# Allegro board ESP8266_PL2303_RELAY.brd
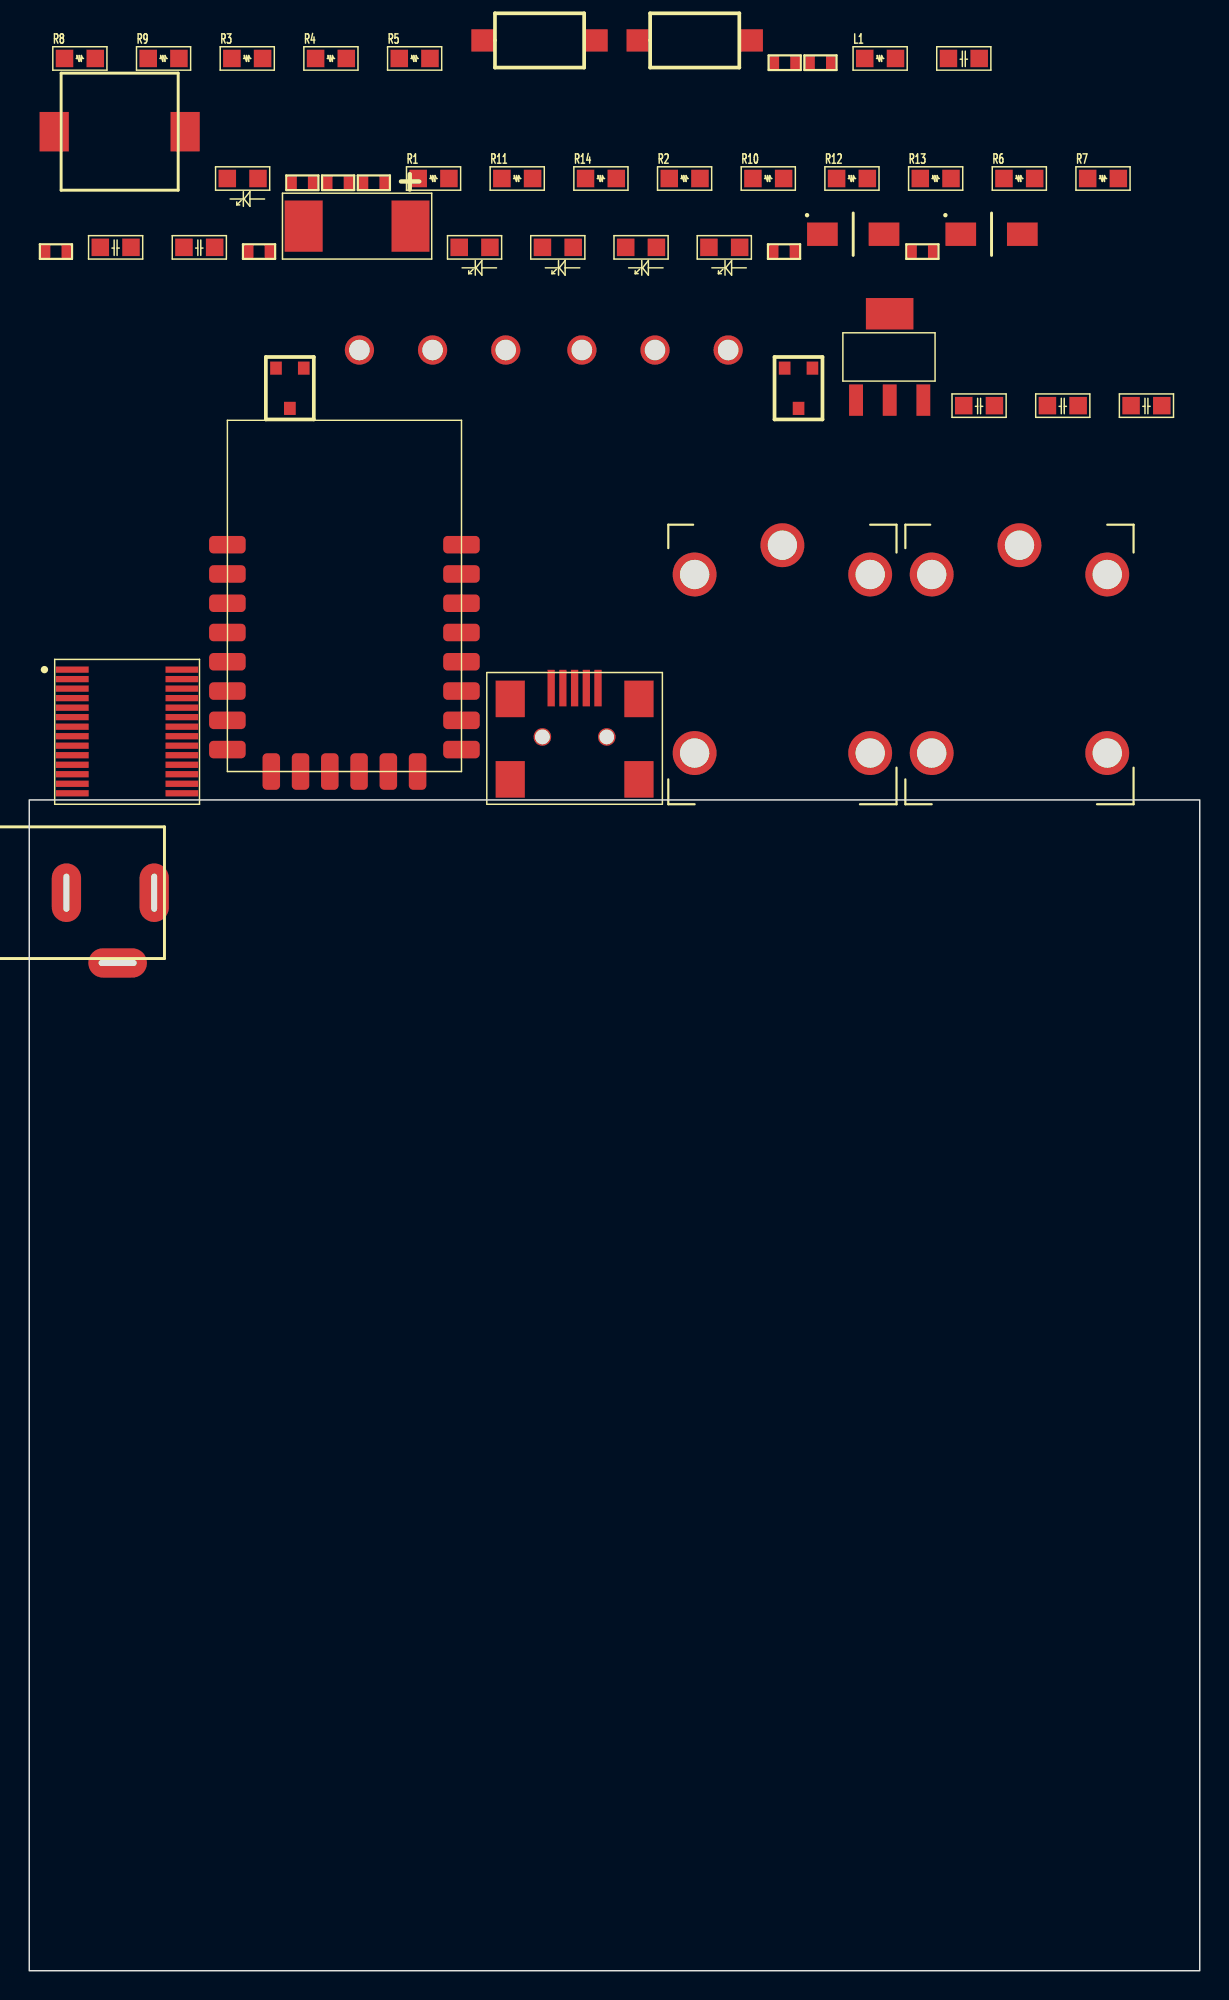
[diagram p0: board, top side]
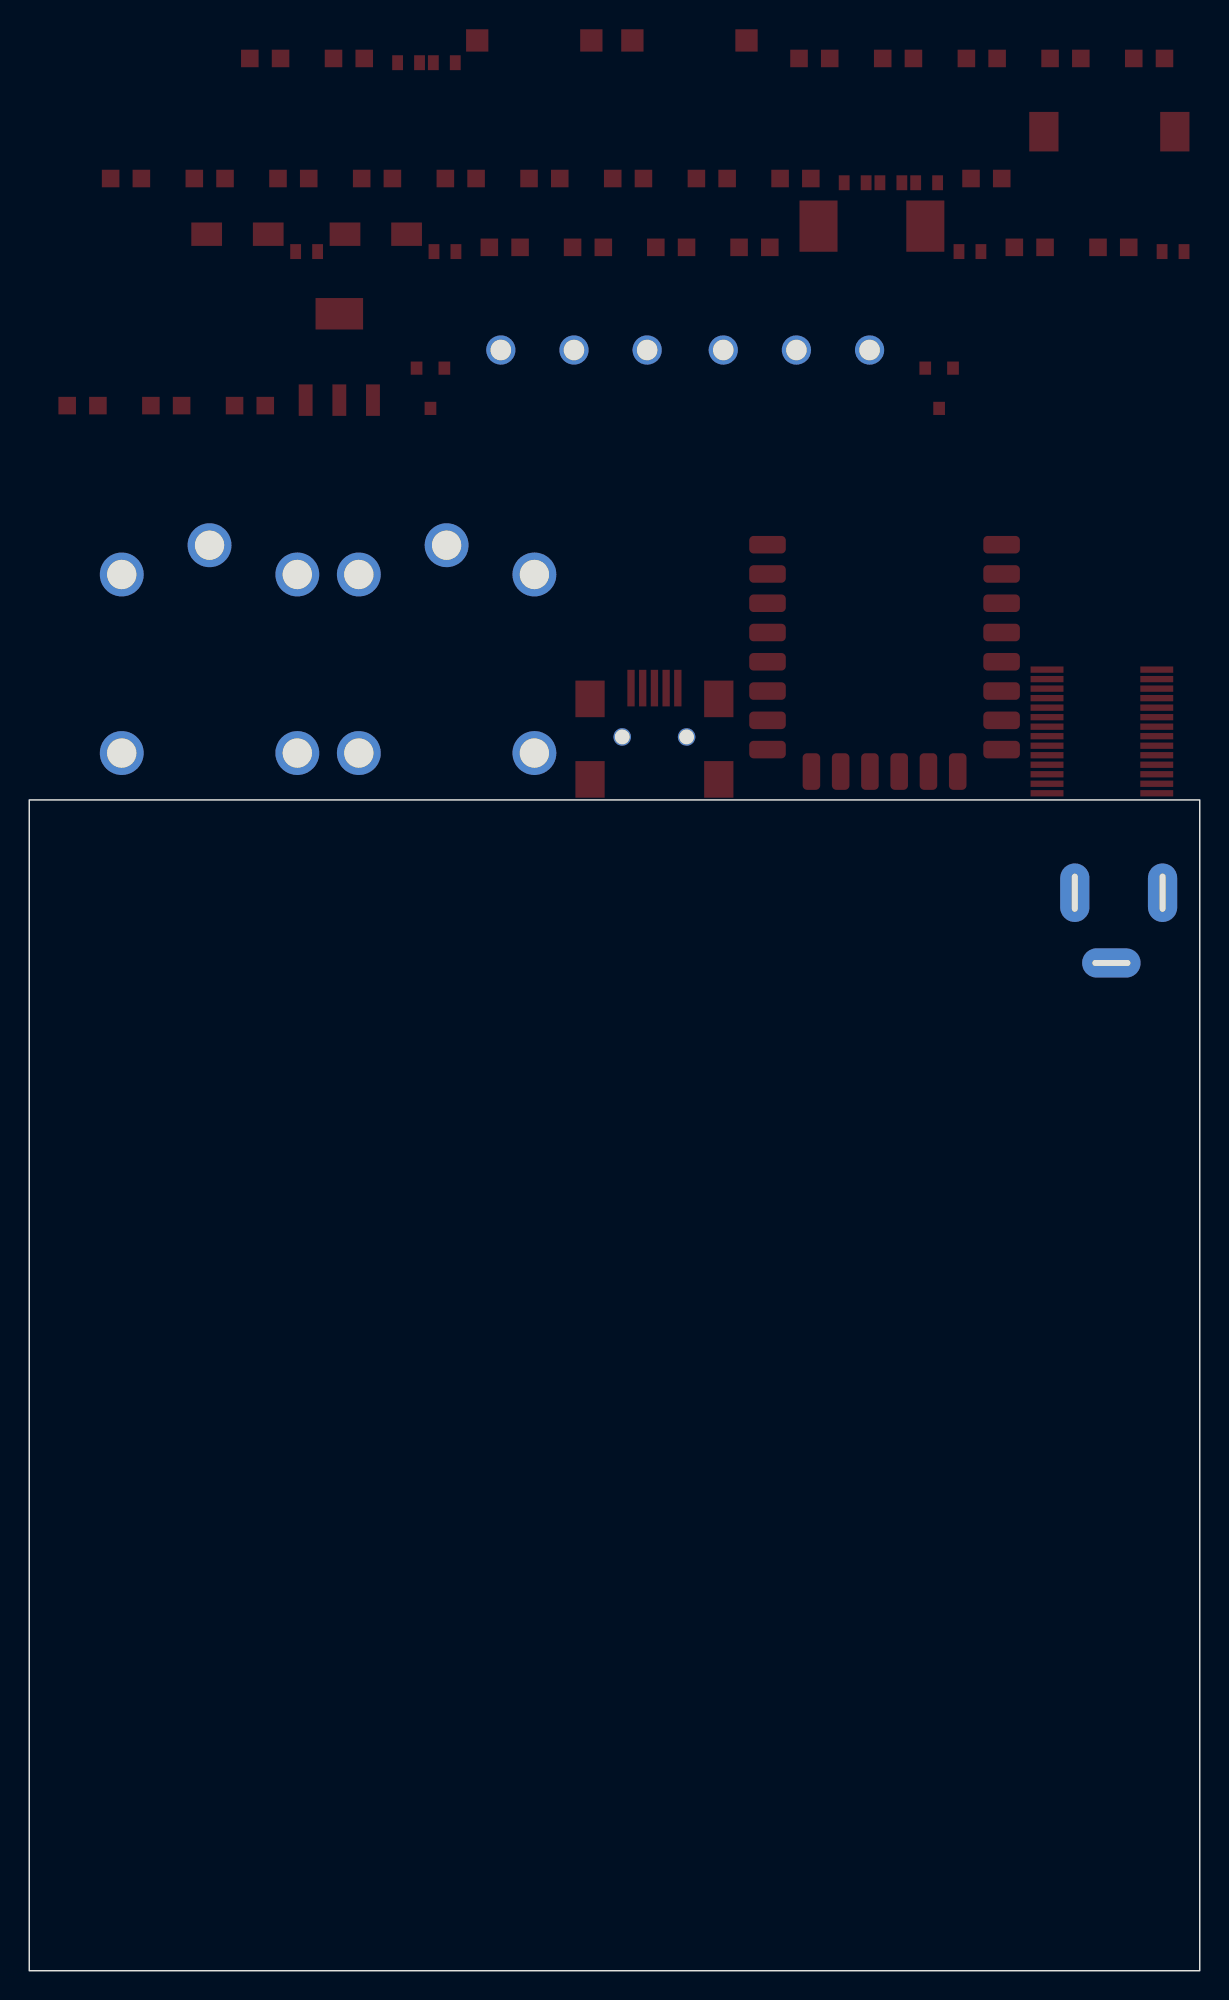
[diagram p1: board, bottom side, seen from below]

Outline 80 x 80 mm; copper layers: TOP, BOTTOM. Coordinates in mm from the lower left corner of the outline.
Outline path: rectangle 0,0 80,80

## Design rules (mm)
constraint set DEFAULT: min track width 0.127

## Placement (name value [footprint] x y rotation side)
C1  10uF  [CAP_SMD_0805]  62.82 130.66 0 top
C2  0.1uF  [CAP_SMD_0805]  63.87 106.94 0 top
C3  0.1uF  [CAP_SMD_0805]  69.59 106.94 0 top
C4  0.1uF  [CAP_SMD_0805]  75.31 106.94 0 top
C5  0.1uF  [CAP_SMD_0805]  10.57 117.76 0 top
C6  100nF  [CAP_SMD_0603]  21.11 122.17 0 top
C7  100nF  [CAP_SMD_0603]  51.59 117.47 0 top
C8  100nF  [CAP_SMD_0603]  15.71 117.47 0 top
C9  100uF  [TANTALUM_7343]  26.06 119.21 0 top
C10  100nF  [CAP_SMD_0603]  54.08 130.37 0 top
C11  0.1uF  [CAP_SMD_0805]  4.85 117.76 0 top
C12  100nF  [CAP_SMD_0603]  51.63 130.37 0 top
C13  100nF  [CAP_SMD_0603]  18.67 122.17 0 top
C14  100nF  [CAP_SMD_0603]  23.55 122.17 0 top
C15  100nF  [CAP_SMD_0603]  61.04 117.47 0 top
C16  1uF  [CAP_SMD_0603]  1.82 117.47 0 top
D1  1N4007  [1N4007_SMD]  56.32 118.65 0 top
D2  TX LED  [LED_SMD_0805]  13.53 122.46 0 top
D3  RX LED  [LED_SMD_0805]  40.76 117.76 0 top
D4  POWER LED  [LED_SMD_0805]  46.45 117.76 0 top
D5  TX LED  [LED_SMD_0805]  29.39 117.76 0 top
D6  1N4007  [1N4007_SMD]  65.77 118.65 0 top
D7  TX LED  [LED_SMD_0805]  35.08 117.76 0 top
J1  CON3  [TERMINALSCREW3PINS5MM]  27.57 110.74 0 top
J2  DC-JACK  [DC_JACK_25_DIP]  2.54 73.66 0 top
J3  CON3  [TERMINALSCREW3PINS5MM]  42.77 110.74 0 top
L1  INDUCTOR  [RES_SMD_0805]  57.11 130.66 0 top
L2  6.8uH4.4A  [IND_SMD_2]  6.18 125.66 0 top
LS1  RELAY SPDT  [SONGLE_RELAY_5PINS]  67.68 89.3 0 top
LS2  RELAY SPDT  [SONGLE_RELAY_5PINS]  51.48 89.3 0 top
Q1  MMBT2222A  [SOT23]  18.76 109.5 0 top
Q2  MMBT2222A  [SOT23]  53.53 109.5 0 top
R1  10K  [RES_SMD_0805]  26.58 122.46 0 top
R2  10K  [RES_SMD_0805]  43.74 122.46 0 top
R3  4.7K  [RES_SMD_0805]  13.85 130.66 0 top
R4  1.5K  [RES_SMD_0805]  19.57 130.66 0 top
R5  0R  [RES_SMD_0805]  25.29 130.66 0 top
R6  330R  [RES_SMD_0805]  66.62 122.46 0 top
R7  330R  [RES_SMD_0805]  72.34 122.46 0 top
R8  330R  [RES_SMD_0805]  2.41 130.66 0 top
R9  330R  [RES_SMD_0805]  8.13 130.66 0 top
R10  330R  [RES_SMD_0805]  49.46 122.46 0 top
R11  10K  [RES_SMD_0805]  32.3 122.46 0 top
R12  330R  [RES_SMD_0805]  55.18 122.46 0 top
R13  330R  [RES_SMD_0805]  60.9 122.46 0 top
R14  10K  [RES_SMD_0805]  38.02 122.46 0 top
SW1  RESET  [SMD_2PIN_BUTTON]  34.88 131.89 0 top
SW2  FLASH  [SMD_2PIN_BUTTON]  45.48 131.89 0 top
U1  MiniUSB  [MINI_USB]  37.27 84.3 0 top
U2  ESP8266-12F  [ESP8266_SMD]  13.54 81.94 0 top
U3  PL2303-HX_SSOP28  [SSOP28]  3.44 88.9 0 top
U4  ASM1117-SOT223  [SOT223]  58.71 110.22 0 top

## Library data of the parts
C1-C5 C11 = CAPACITOR NON-POL
C6-C8 C10 C12-C15 = CAP NP
C9 = CAPACITOR POL
C16 = CAP_0
D1 D6 = DIODE_0
D2-D5 D7 = LED
J1 J3 = CON3
J2 = DC-JACK_1
L1 L2 = INDUCTOR
LS1 LS2 = RELAY SPDT
Q1 Q2 = NPN BEC_1
R1-R14 = R
SW1 SW2 = SW_PB_SPST
U1 = Mini USB
U2 = ESP-12F
U3 = PL2303-HX_SSOP28
U4 = ASM1117-SOT223_0

## Footprints (pads in the part's own frame, mm; a bottom-side part is the same pattern mirrored in y, then rotated)
1N4007_SMD
  rect 2.1x1.6 smd: A(2.104,0) C(-2.104,0)
CAP_SMD_0603
  rect 0.74x1.02 smd: 1(-0.75,0) 2(0.75,0)
CAP_SMD_0805
  rect 1.2x1.2 smd: 1(0,0) 2(2.1,0)
DC_JACK_25_DIP
  oval 2x4 hole 0.4x2.6: 1(0,0) 3(6,0)
  oval 4x2 hole 2.6x0.4: 2(3.5,-4.8)
ESP8266_SMD
  rrect 2.5x1.2 smd: 1(0,15.5) 2(0,13.5) 3(0,11.5) 4(0,9.5) 5(0,7.5) 6(0,5.5) 7(0,3.5) 8(0,1.5) 15(16,1.5) 16(16,3.5) 17(16,5.5) 18(16,7.5) 19(16,9.5) 20(16,11.5) 21(16,13.5) 22(16,15.5)
  rrect 1.2x2.5 smd: 9(3,0) 10(5,0) 11(7,0) 12(9,0) 13(11,0) 14(13,0)
IND_SMD_2
  rect 2x2.7 smd: 1(-4.475,0) 2(4.475,0)
LED_SMD_0805
  rect 1.2x1.2 smd: 1(0,0) 2(2.1,0)
MINI_USB
  rect 0.5x2.5 smd: 1(-1.6,3.336) 2(-0.8,3.336) 3(0,3.336) 4(0.8,3.336) 5(1.6,3.336)
  rect 2x2.5 smd: 6(4.4,2.6) 7(-4.4,2.6) 8(-4.4,-2.9) 9(4.4,-2.9)
  round 1.2 hole 1: 10(2.2,0) 11(-2.2,0)
RES_SMD_0805
  rect 1.2x1.2 smd: 1(0,0) 2(2.1,0)
SMD_2PIN_BUTTON
  rect 1.524x1.524 smd: 1(-3.9,0) 2(3.9,0)
SONGLE_RELAY_5PINS
  round 3 hole 2: 1(-6,6.1) 2(6,6.1) 3(0,8.1) 4(6,-6.1) 5(-6,-6.1)
SOT23
  rect 0.8x0.9 smd: 1(0,0) 2(-1.9,0) 3(-0.95,-2.75)
SOT223
  rect 3.25x2.15 smd: (0.1,3)
  rect 0.95x2.15 smd: 1(-2.201,-2.901) 2(0.099,-2.901) 3(2.399,-2.901)
SSOP28
  rect 2.25x0.43 smd: 1(-0.5,0) 2(-0.5,-0.65) 3(-0.5,-1.3) 4(-0.5,-1.95) 5(-0.5,-2.6) 6(-0.5,-3.25) 7(-0.5,-3.9) 8(-0.5,-4.55) 9(-0.5,-5.2) 10(-0.5,-5.85) 11(-0.5,-6.5) 12(-0.5,-7.15) 13(-0.5,-7.8) 14(-0.5,-8.45) 15(7,-8.45) 16(7,-7.8) 17(7,-7.15) 18(7,-6.5) 19(7,-5.85) 20(7,-5.2) 21(7,-4.55) 22(7,-3.9) 23(7,-3.25) 24(7,-2.6) 25(7,-1.95) 26(7,-1.3) 27(7,-0.65) 28(7,0)
TANTALUM_7343
  rect 2.6x3.5 smd: 1(0,0) 2(-7.3,0)
TERMINALSCREW3PINS5MM
  round 2 hole 1.4: 1(-5,0) 2(0,0) 3(5,0)

## Nets
3V3: C2.1 C4.2 C12.1 C13.1 C14.1 C15.1 C16.1 R1.1 R2.2 R3.1 R4.2 R6.1 R7.1 R8.1 U2.8(VCC) U3.4 U3.17(VO_33) U3.19 U4.2(VOUT)
5V: C1.1 C3.2 C5.1 C6.1 C7.1 C8.1 C9.1 C10.1 C11.1 D1.C(K) D6.C(K) L1.2 L2.1 LS1.1 LS2.1 R5.1 U3.20 U4.3
GND: C1.2 C3.1 C4.1 C6.2 C7.2 C8.2 C9.2 C10.2 C12.2 C13.2 C14.2 C15.2 C16.2 D4.1(CATHODE) D5.1(CATHODE) D7.1(CATHODE) J2.1 J2.2 Q1.2(E) Q2.2(E) R11.2 R14.2 SW1.1 SW2.2 U1.5 U2.15 U3.18 U3.25 U3.26 U4.1
DM: U1.2 U3.16
DP: R4.1 U1.3 U3.15
ESP_RX: D2.1(CATHODE) U2.21 U3.1
ESP_TX: D3.1(CATHODE) U2.22 U3.5
GPIO12: R9.1 R10.2 U2.6
GPIO13: R12.1 R13.2 U2.7
N48140: L1.1 U1.1
N48384: C2.2 U3.7
N48448: R3.2 U3.10
N49572: R1.2 SW1.2 U2.1
N49752: R2.1 SW2.1 U2.18
N50114: C5.2 D1.A LS1.2 Q1.3
N50647: Q1.1 R9.2 R11.1
N50922: J1.1 LS1.5
N50926: J1.3 LS1.4(NO)
N50951: J1.2 LS1.3
N51152: J3.2 LS2.3
N51204: J3.1 LS2.5
N51220: J3.3 LS2.4(NO)
N51252: C11.2 D6.A LS2.2 Q2.3
N51344: Q2.1 R12.2 R14.1
N466397: J2.3(VCC) L2.2 R5.2
N494201: D2.2 R6.2
N494361: D3.2 R7.2
N508120: D5.2 R10.1
N513640: D7.2 R13.1
N530151: D4.2 R8.2

Pads without a net: U1 4 6 7 8 9 10 11; U2 2 3 4 5 9 10 11 12 13 14 16 17 19 20; U3 2 3 6 8 9 11 12 13 14 21 22 23 24 27 28
